# EAGLE board main controler-copy (EAGLE 9.5.2)
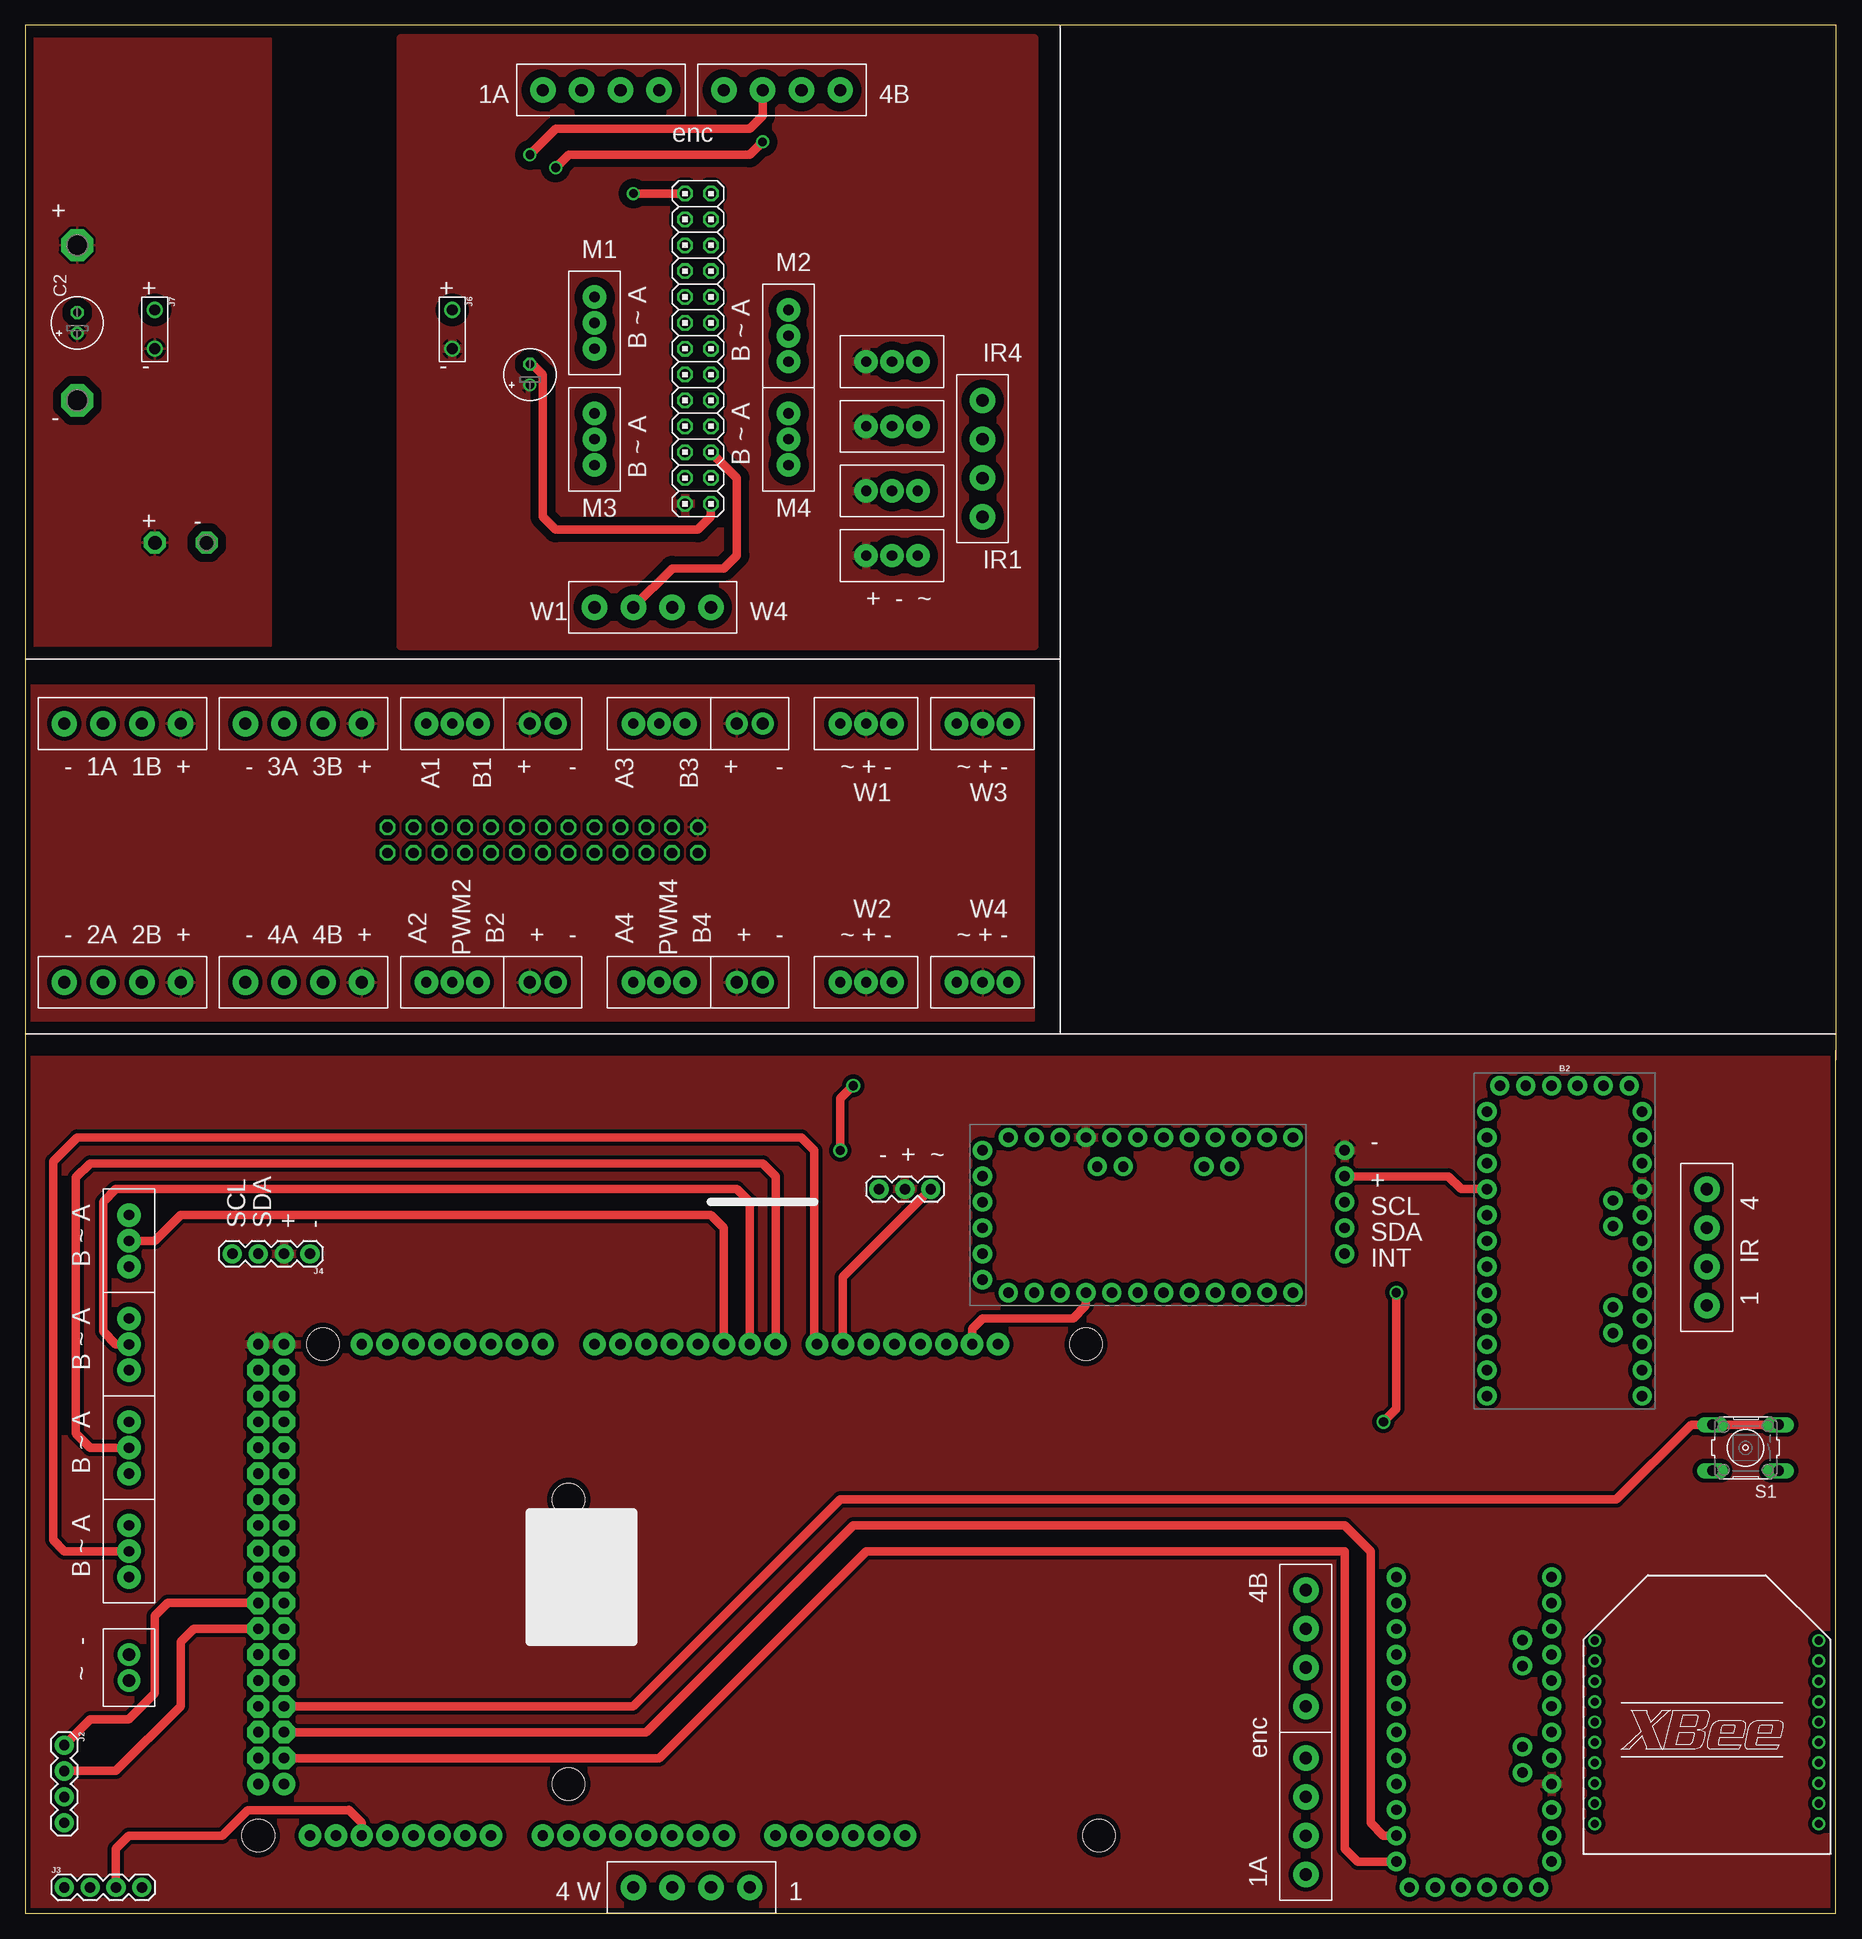
[diagram p0: board, top side]
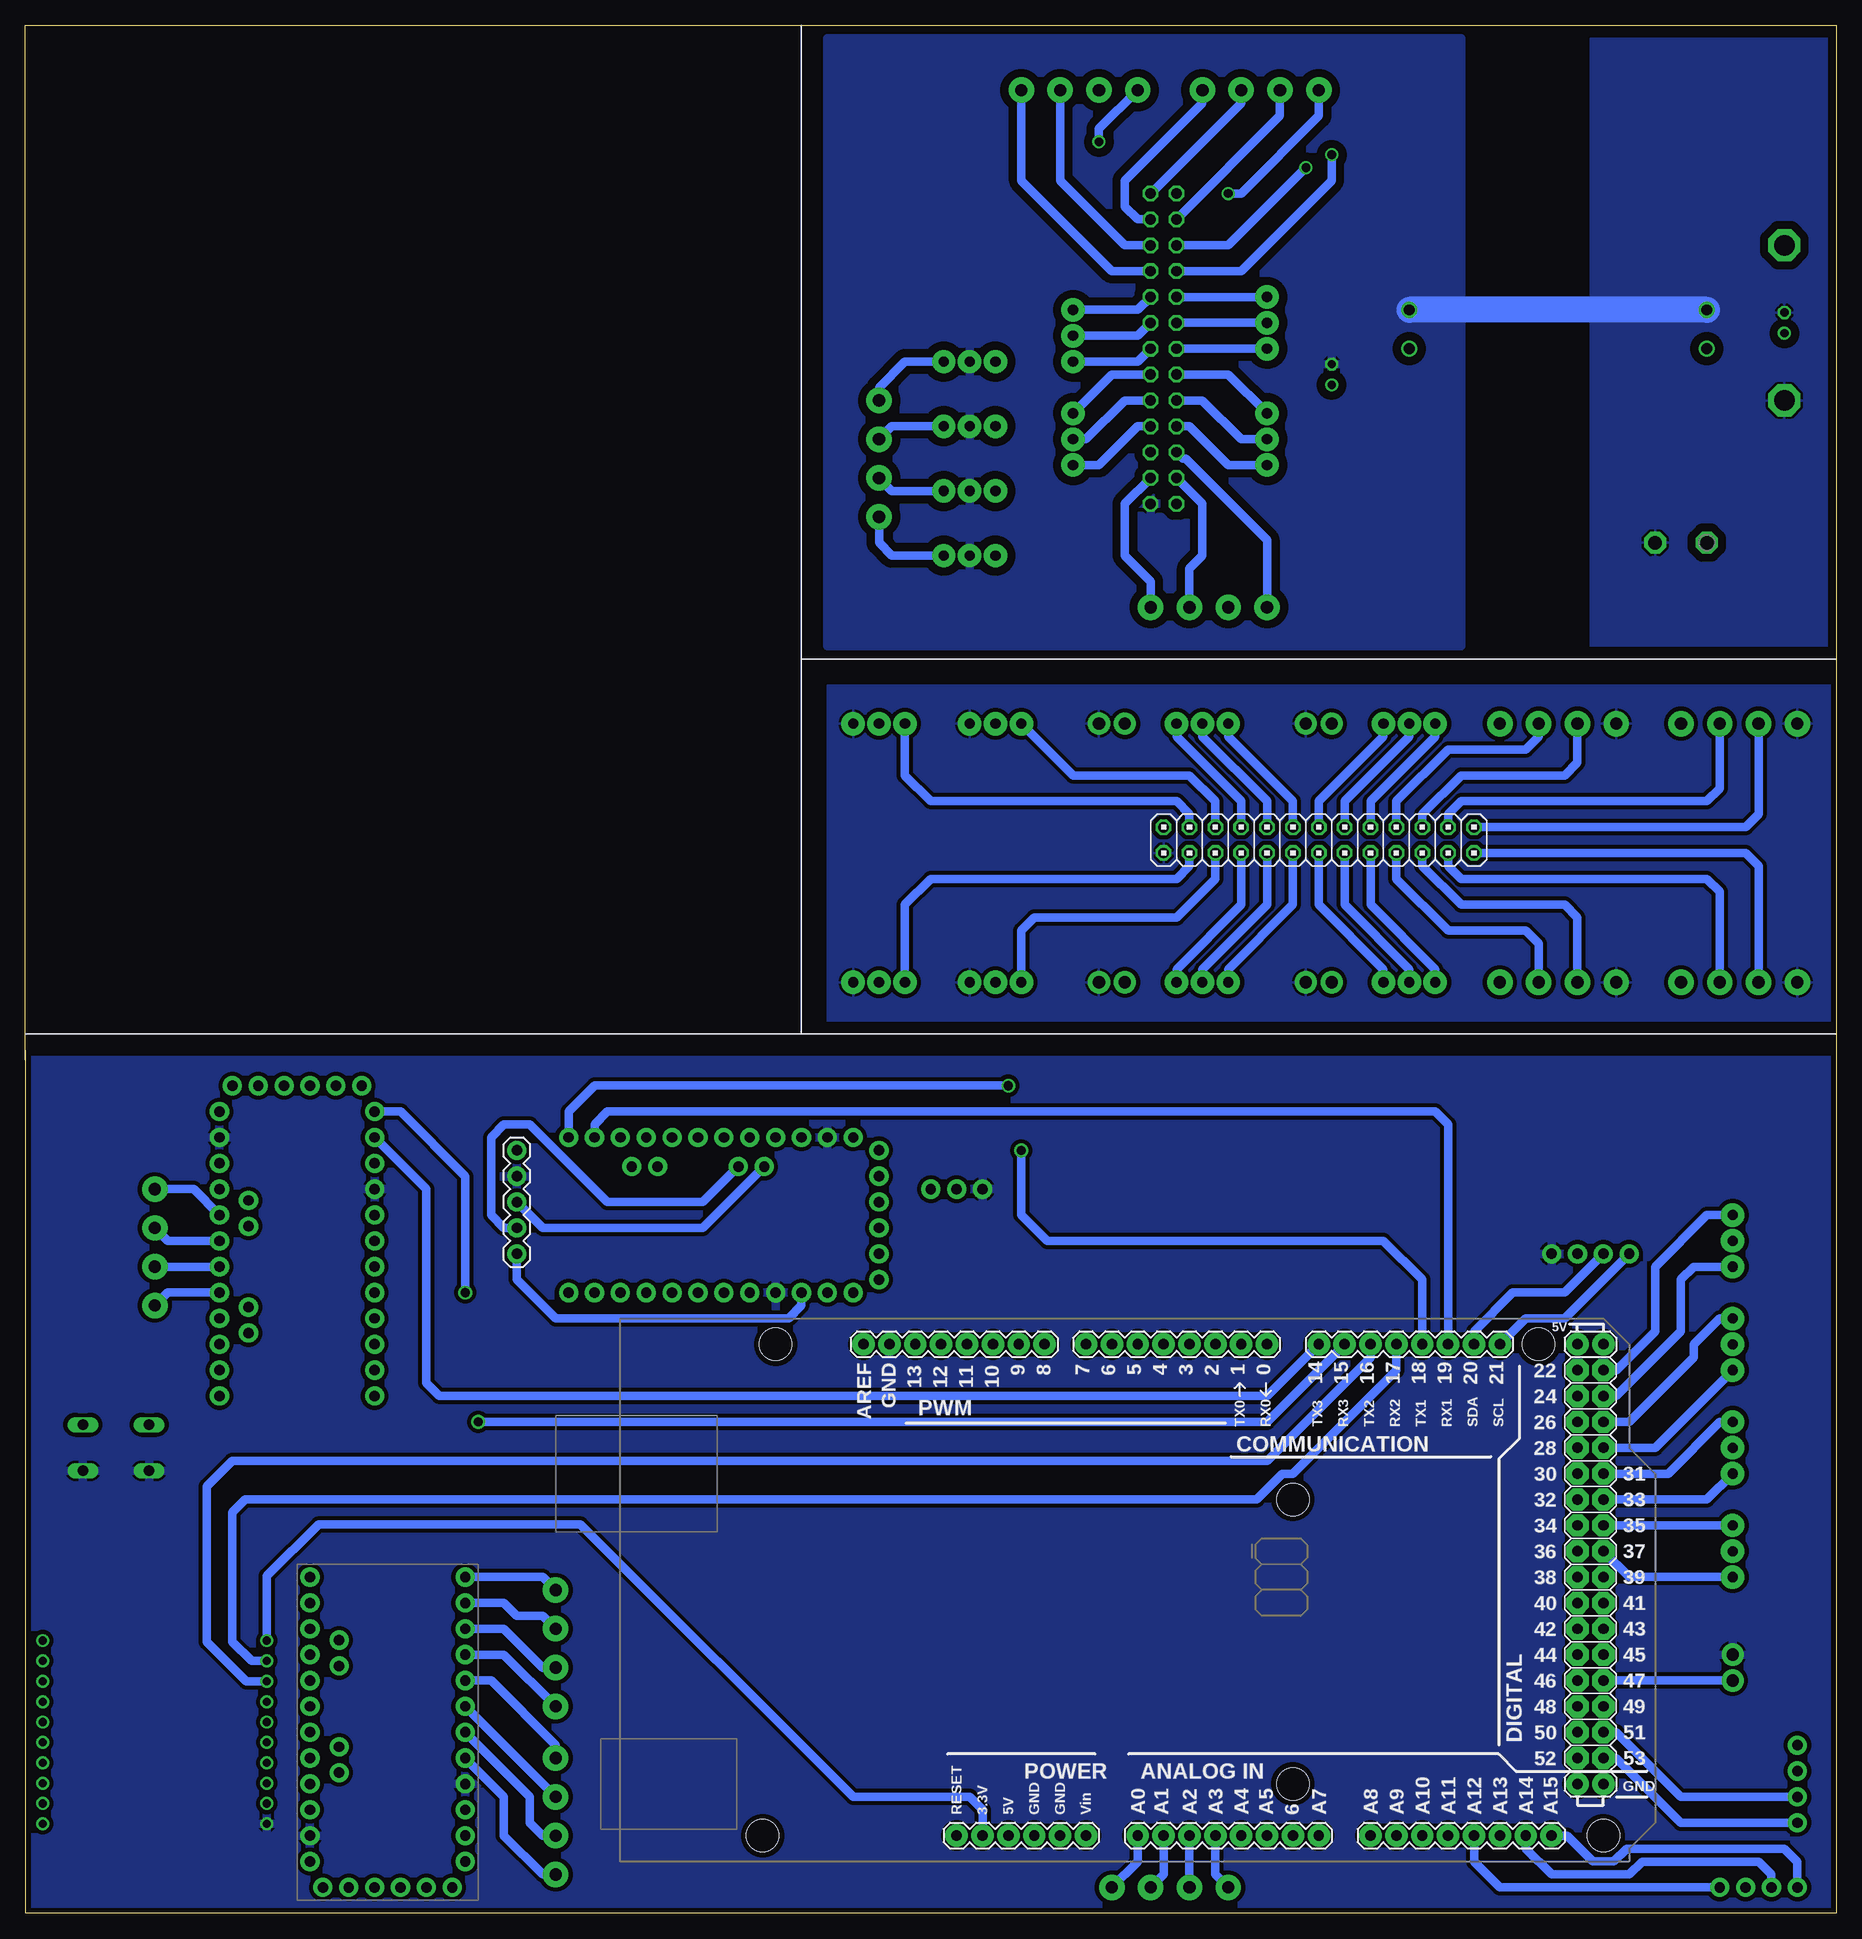
[diagram p1: board, bottom side, seen from below]

Size 177.8 x 185.42 mm. Coordinates in mm from the lower left corner, seen from the top.
Outline: 177.78,84.76 177.78,0 0,0 0,88.57
Outline: 177.8,83.82 177.8,185.42 0,185.42 0,87.63
Copper layers (1*16): Top 0.035mm / dielectric 1.6mm / Bottom 0.035mm
Design rules "Elecrow_2-layer_PCB_eagle_rule": minimum track width 6mil, minimum drill 12mil, track to track 6mil, track to pad 6mil, pad to pad 6mil, via to via 8mil, smd to smd 0mil, copper to edge 20mil, drill to drill 10mil, minimum pad ring 6mil, minimum via ring 6mil, stop-mask expansion 0mil, vias tented up to drill 100mil, thermal gap 10mil

## Footprints (pad centres in the part's own frame; a part is rotated, then mirrored left to right if it is on the bottom)
3PIN = drill 1 pad 2.3: P$1 0,0; P$2 2.54,0; P$3 5.08,0
ARDUINO_MEGA = drill 1.016 pad 2.2: 0 13.97,24.13; 1 11.43,24.13; 2 8.89,24.13; 3 6.35,24.13; 3.3V -13.97,-24.13; 4 3.81,24.13; 5 1.27,24.13; 5V@0 -11.43,-24.13; 5V@1 44.45,24.13; 5V@2 46.99,24.13; 6 -1.27,24.13; 7 -3.81,24.13; 8 -7.874,24.13; 9 -10.414,24.13; 10 -12.954,24.13; 11 -15.494,24.13; 12 -18.034,24.13; 13 -20.574,24.13; 14 19.05,24.13; 15 21.59,24.13; 16 24.13,24.13; 17 26.67,24.13; 18 29.21,24.13; 19 31.75,24.13; 20 34.29,24.13; 21 36.83,24.13; A0 1.27,-24.13; A1 3.81,-24.13; A2 6.35,-24.13; A3 8.89,-24.13; A4 11.43,-24.13; A5 13.97,-24.13; A6 16.51,-24.13; A7 19.05,-24.13; A8 24.13,-24.13; A9 26.67,-24.13; A10 29.21,-24.13; A11 31.75,-24.13; A12 34.29,-24.13; A13 36.83,-24.13; A14 39.37,-24.13; A15 41.91,-24.13; AREF -25.654,24.13; GND@0 -8.89,-24.13; GND@1 -6.35,-24.13; GND@2 44.45,-19.05; GND@3 46.99,-19.05; GND@4 -23.114,24.13; RESET -16.51,-24.13; VIN -3.81,-24.13 | drill 1.016 pad 2.2 octagon: 22 44.45,21.59; 23 46.99,21.59; 24 44.45,19.05; 25 46.99,19.05; 26 44.45,16.51; 27 46.99,16.51; 28 44.45,13.97; 29 46.99,13.97; 30 44.45,11.43; 31 46.99,11.43; 32 44.45,8.89; 33 46.99,8.89; 34 44.45,6.35; 35 46.99,6.35; 36 44.45,3.81; 37 46.99,3.81; 38 44.45,1.27; 39 46.99,1.27; 40 44.45,-1.27; 41 46.99,-1.27; 42 44.45,-3.81; 43 46.99,-3.81; 44 44.45,-6.35; 45 46.99,-6.35; 46 44.45,-8.89; 47 46.99,-8.89; 48 44.45,-11.43; 49 46.99,-11.43; 50 44.45,-13.97; 51 46.99,-13.97; 52 44.45,-16.51; 53 46.99,-16.51 | hole 3.2: -34.29,24.13; -35.56,-24.13; 16.51,8.89; 16.51,-19.05; 40.64,24.13; 46.99,-24.13
ARDUINO_PRO_MINI = drill 1.016 pad 1.88: 1 -7.62,12.7; 2 -7.62,10.16; 3 -7.62,7.62; 4 -7.62,5.08; 5 -7.62,2.54; 6 -7.62,0; 7 -7.62,-2.54; 8 -7.62,-5.08; 9 -7.62,-7.62; 10 -7.62,-10.16; 11 -7.62,-12.7; 12 -7.62,-15.24; 13 7.62,-15.24; 14 7.62,-12.7; 15 7.62,-10.16; 16 7.62,-7.62; 17 7.62,-5.08; 18 7.62,-2.54; 19 7.62,0; 20 7.62,2.54; 21 7.62,5.08; 22 7.62,7.62; 23 7.62,10.16; 24 7.62,12.7; A4 4.763,1.429; A5 4.763,3.969; A6 4.763,-9.049; A7 4.763,-6.509; BLK -6.35,15.24; GND -3.81,15.24; GRN 6.35,15.24; RXI 1.27,15.24; TXO 3.81,15.24; VCC -1.27,15.24
E2-5 = drill 0.813 pad 1.27: + -1.016,0 | drill 0.813 pad 1.27 octagon: - 1.016,0
2PIN = drill 1.2 pad 2.5: 1 0,0; 2 3.81,0; 3 7.62,0; 4 11.43,0
2PIN' = drill 1.2 pad 2.184: 1 0,0; 2 2.54,0
1X05 = drill 1.016 pad 1.88: 1 0,0; 2 2.54,0; 3 5.08,0; 4 7.62,0; 5 10.16,0
1X04 = drill 1.016 pad 1.88: 1 0,0; 2 2.54,0; 3 5.08,0; 4 7.62,0
1X03 = drill 1.016 pad 1.88: 1 0,0; 2 2.54,0; 3 5.08,0
1X02_BIG = drill 1.067: P$1 0,0; P$2 3.81,0
2X13 = drill 1.016 octagon: 1 -15.24,-1.27; 2 -15.24,1.27; 3 -12.7,-1.27; 4 -12.7,1.27; 5 -10.16,-1.27; 6 -10.16,1.27; 7 -7.62,-1.27; 8 -7.62,1.27; 9 -5.08,-1.27; 10 -5.08,1.27; 11 -2.54,-1.27; 12 -2.54,1.27; 13 0,-1.27; 14 0,1.27; 15 2.54,-1.27; 16 2.54,1.27; 17 5.08,-1.27; 18 5.08,1.27; 19 7.62,-1.27; 20 7.62,1.27; 21 10.16,-1.27; 22 10.16,1.27; 23 12.7,-1.27; 24 12.7,1.27; 25 15.24,-1.27; 26 15.24,1.27
B3F-10XX = drill 1.016 long: 1 -3.251,2.261; 2 3.251,2.261; 3 -3.251,-2.261; 4 3.251,-2.261
TESTPAD_P1-20 = drill 2.007 pad 3.15 octagon: TP 0,0
TESTPAD_P1-13 = drill 1.321 pad 2.159 octagon: TP 0,0
XBEE = drill 0.8 pad 1.27: 1 -11,9; 2 -11,7; 3 -11,5; 4 -11,3; 5 -11,1; 6 -11,-1; 7 -11,-3; 8 -11,-5; 9 -11,-7; 10 -11,-9; 11 11,-9; 12 11,-7; 13 11,-5; 14 11,-3; 15 11,-1; 16 11,1; 17 11,3; 18 11,5; 19 11,7; 20 11,9

## Placement (x,y rotation side)
3PIN1  3PIN  [3PIN]  80.01,116.84 0 top
3PIN2  3PIN  [3PIN]  80.01,91.44 0 top
3PIN3  3PIN  [3PIN]  91.44,116.84 0 top
3PIN4  3PIN  [3PIN]  91.44,91.44 0 top
3PIN5  3PIN  [3PIN]  44.45,116.84 180 top
3PIN6  3PIN  [3PIN]  44.45,91.44 180 top
3PIN7  3PIN  [3PIN]  64.77,116.84 180 top
3PIN8  3PIN  [3PIN]  64.77,91.44 180 top
B1  ARDUINO_MEGA_R3FULL  [ARDUINO_MEGA]  69.85,31.75 0 bottom
B2  ARDUINO_PRO_MINI  [ARDUINO_PRO_MINI]  151.13,66.04 0 top
B3  ARDUINO_PRO_MINI  [ARDUINO_PRO_MINI]  109.22,68.58 90 top
B4  ARDUINO_PRO_MINI  [ARDUINO_PRO_MINI]  142.24,17.78 180 bottom
C1  [E2-5]  49.53,151.13 90 top
C2  [E2-5]  5.08,156.21 90 top
CONNECTOR1  2PIN  [2PIN]  93.98,137.16 90 top
CONNECTOR2  2PIN  [2PIN]  55.88,128.27 0 top
CONNECTOR3  2PIN  [2PIN]  62.23,179.07 180 top
CONNECTOR4  2PIN  [2PIN]  80.01,179.07 180 top
CONNECTOR5  2PIN  [2PIN']  72.39,116.84 180 top
CONNECTOR6  2PIN  [2PIN']  72.39,91.44 180 top
CONNECTOR7  2PIN  [2PIN']  52.07,116.84 180 top
CONNECTOR8  2PIN  [2PIN']  52.07,91.44 180 top
CONNECTOR9  2PIN  [2PIN]  15.24,116.84 180 top
CONNECTOR10  2PIN  [2PIN]  15.24,91.44 180 top
CONNECTOR11  2PIN  [2PIN]  33.02,116.84 180 top
CONNECTOR12  2PIN  [2PIN]  33.02,91.44 180 top
ENCODER1  2PIN  [2PIN]  125.73,20.32 90 top
ENCODER2  2PIN  [2PIN]  125.73,3.81 90 top
ENCODER3  2PIN  [2PIN]  71.12,2.54 180 top
ENCODER4  2PIN  [2PIN]  165.1,59.69 90 top
IR_DISTANCE1  3PIN  [3PIN]  82.55,152.4 0 top
IR_DISTANCE2  3PIN  [3PIN]  82.55,146.05 0 top
IR_DISTANCE3  3PIN  [3PIN]  82.55,139.7 0 top
IR_DISTANCE4  3PIN  [3PIN]  82.55,133.35 0 top
IR_DISTANCE5  3PIN  [3PIN]  55.88,153.67 90 top
IR_DISTANCE6  3PIN  [3PIN]  74.93,157.48 270 top
IR_DISTANCE7  3PIN  [3PIN]  55.88,142.24 90 top
IR_DISTANCE8  3PIN  [3PIN]  74.93,147.32 270 top
J1  [1X05]  129.54,64.77 90 bottom
J2  [1X04]  3.81,16.51 270 top
J3  [1X04]  3.81,2.54 0 top
J4  [1X04]  27.94,64.77 180 top
J5  [1X03]  83.82,71.12 0 top
J6  [1X02_BIG]  41.91,157.48 270 top
J7  [1X02_BIG]  12.7,157.48 270 top
JP1  [2X13]  66.04,153.67 270 top
JP2  [2X13]  50.8,105.41 180 bottom
MOTOR1  3PIN  [3PIN]  10.16,68.58 270 top
MOTOR2  3PIN  [3PIN]  10.16,58.42 270 top
MOTOR3  3PIN  [3PIN]  10.16,48.26 270 top
MOTOR4  3PIN  [3PIN]  10.16,38.1 270 top
S1  [B3F-10XX]  168.91,45.72 180 top
SOLENOID  2PIN  [2PIN']  10.16,22.86 90 top
TP9  TESTPAD_TPSQPAD1-20  [TESTPAD_P1-20]  5.08,163.83 0 top
TP10  TESTPAD_TPSQPAD1-20  [TESTPAD_P1-20]  5.08,148.59 0 top
TP15  TESTPAD_TPSQPAD1-13  [TESTPAD_P1-13]  12.7,134.62 0 bottom
TP16  TESTPAD_TPSQPAD1-13  [TESTPAD_P1-13]  17.78,134.62 0 top
XB1  XBEE  [XBEE]  165.1,17.78 0 top

## Library data of the parts
3PIN1-3PIN8 IR_DISTANCE1-IR_DISTANCE8 MOTOR1-MOTOR4 = 3PIN_2
B1-B4 = Arduino
C1 C2 = rcl; SPICEPREFIX: C
CONNECTOR1-CONNECTOR4 CONNECTOR9-CONNECTOR12 ENCODER1-ENCODER4 = 4pin_small
CONNECTOR5-CONNECTOR8 SOLENOID = 2pin_small
J1 J5-J7 = SparkFun-Connectors
J2-J4 = SparkFun-Connectors; PROD_ID: CONN-09696
JP1 JP2 = pinhead
S1 = DC_LOAD_AU; MPN: B3F-1000; OC_FARNELL: 176432; OC_NEWARK: 36M3542
TP9 TP10 TP15 TP16 = BeagleBone_Blue_R3
XB1 = maxstream; MPN: XBP24-Z7UIT-004; OC_FARNELL: 1751799; OC_NEWARK: 34R5507

## Nets
1_A: B4.5 ENCODER2.1
1_A1: CONNECTOR3.4 JP1.1
1_A2: CONNECTOR9.3 JP2.1
1_B: B4.6 ENCODER2.2
1_B1: CONNECTOR3.3 JP1.3
1_B2: CONNECTOR9.2 JP2.3
2_A: B4.7 ENCODER2.3
2_A1: CONNECTOR3.2 JP1.2
2_A2: CONNECTOR10.3 JP2.2
2_B: B4.8 ENCODER2.4
2_B1: CONNECTOR3.1 JP1.4
2_B2: CONNECTOR10.2 JP2.4
3_A: B4.9 ENCODER1.1
3_A1: CONNECTOR4.4 JP1.5
3_A2: CONNECTOR11.3 JP2.5
3_B: B4.10 ENCODER1.2
3_B1: CONNECTOR4.3 JP1.7
3_B2: CONNECTOR11.2 JP2.7
4_A: B4.11 ENCODER1.3
4_A1: CONNECTOR4.2 JP1.6
4_A2: CONNECTOR12.3 JP2.6
4_B: B4.12 ENCODER1.4
4_B1: CONNECTOR4.1 JP1.8
4_B2: CONNECTOR12.2 JP2.8
A1: B1.23 MOTOR1.P$1
A2: B1.27 MOTOR2.P$1
A3: B1.31 MOTOR3.P$1
A4: B1.35 MOTOR4.P$1
A5: IR_DISTANCE7.P$3 JP1.15
A6: IR_DISTANCE8.P$1 JP1.16
A7: IR_DISTANCE6.P$1 JP1.10
A8: IR_DISTANCE5.P$3 JP1.9
A9: 3PIN5.P$3 JP2.9
A10: 3PIN6.P$3 JP2.10
A11: 3PIN7.P$3 JP2.15
A12: 3PIN8.P$3 JP2.16
B1: B1.25 MOTOR1.P$3
B2: B1.29 MOTOR2.P$3
B3: B1.33 MOTOR3.P$3
B4: B1.37 MOTOR4.P$3
B5: IR_DISTANCE8.P$3 JP1.20
B6: IR_DISTANCE7.P$1 JP1.19
B7: IR_DISTANCE6.P$3 JP1.14
B8: IR_DISTANCE5.P$1 JP1.13
B9: 3PIN5.P$1 JP2.13
B10: 3PIN6.P$1 JP2.14
B11: 3PIN7.P$1 JP2.19
B12: 3PIN8.P$1 JP2.20
BALL_SENSOR: B1.49
BUTTON: B1.48 S1.3 S1.4
DRIBBLER: B1.9 J5.3
GND: B1.GND@4 B2.4 B2.23 B3.4 B3.23 B4.4 B4.23 J1.4 J4.1 J5.1 S1.1 S1.2 SOLENOID.2 XB1.10
GND1: C1.- C2.- IR_DISTANCE1.P$2 IR_DISTANCE2.P$2 IR_DISTANCE3.P$2 IR_DISTANCE4.P$2 J6.P$1 J7.P$1 JP1.26 TP10.TP TP16.TP
GND2: 3PIN1.P$3 3PIN2.P$3 3PIN3.P$3 3PIN4.P$3 CONNECTOR5.1 CONNECTOR6.1 CONNECTOR7.1 CONNECTOR8.1 CONNECTOR9.4 CONNECTOR10.4 CONNECTOR11.4 CONNECTOR12.4 JP2.26
INT: B3.3 J1.1
IR1: B2.17 ENCODER4.1
IR2: B2.18 ENCODER4.2
IR3: B2.19 ENCODER4.3
IR4: B2.20 ENCODER4.4
IR5: CONNECTOR1.3 IR_DISTANCE2.P$3
IR6: CONNECTOR1.2 IR_DISTANCE3.P$3
IR7: CONNECTOR1.1 IR_DISTANCE4.P$3
IR8: CONNECTOR1.4 IR_DISTANCE1.P$3
N$1: B1.3.3V XB1.1
N$2: B1.16 XB1.3
N$3: B1.15 B2.1
N$4: B1.14 B2.2
N$5: B1.17 XB1.2
N$6: B1.19 B3.14
N$7: B1.18 B3.13
N$8: B1.50 B4.2
N$9: B1.52 B4.1
N$10: B2.24
N$11: B3.24
N$12: B4.24
N$13: B1.43 J2.2
N$14: B1.51 J2.3
N$15: B1.53 J2.4
N$16: B1.41 J2.1
N$17: B1.A15 J3.1
N$18: B1.A14 J3.2
N$19: B1.A13 J3.3
N$20: B1.A12 J3.4
N$22: B1.21 J4.4
N$23: B1.20 J4.3
PWM1: B1.5 MOTOR1.P$2
PWM2: B1.6 MOTOR2.P$2
PWM3: B1.7 MOTOR3.P$2
PWM4: B1.8 MOTOR4.P$2
PWM5: IR_DISTANCE7.P$2 JP1.17
PWM6: IR_DISTANCE8.P$2 JP1.18
PWM7: IR_DISTANCE6.P$2 JP1.12
PWM8: IR_DISTANCE5.P$2 JP1.11
PWM9: 3PIN5.P$2 JP2.11
PWM10: 3PIN6.P$2 JP2.12
PWM11: 3PIN7.P$2 JP2.17
PWM12: 3PIN8.P$2 JP2.18
SCL: B3.A5 J1.3
SDA: B3.A4 J1.2
SOLENOID: B1.47 SOLENOID.1
VCC: B1.5V@1 B1.5V@2 B2.21 B3.21 B4.21 J1.5 J4.2 J5.2
VCC1: C1.+ IR_DISTANCE1.P$1 IR_DISTANCE2.P$1 IR_DISTANCE3.P$1 IR_DISTANCE4.P$1 J6.P$2 JP1.25
VCC2: 3PIN1.P$2 3PIN2.P$2 3PIN3.P$2 3PIN4.P$2 CONNECTOR5.2 CONNECTOR6.2 CONNECTOR7.2 CONNECTOR8.2 CONNECTOR9.1 CONNECTOR10.1 CONNECTOR11.1 CONNECTOR12.1 JP2.25
VDD: C2.+ J7.P$2 TP9.TP TP15.TP
W1: B1.A0 ENCODER3.1
W2: B1.A1 ENCODER3.2
W3: B1.A2 ENCODER3.3
W4: B1.A3 ENCODER3.4
W5: CONNECTOR2.1 JP1.21
W6: CONNECTOR2.2 JP1.22
W7: CONNECTOR2.4 JP1.24
W8: CONNECTOR2.3 JP1.23
W9: 3PIN1.P$1 JP2.21
W10: 3PIN2.P$1 JP2.22
W11: 3PIN3.P$1 JP2.23
W12: 3PIN4.P$1 JP2.24

## Tracks (layer width: path | path; a pad name or v marks a point on that pad's centre or on a via)
1_A
  Bottom 0.813: B4.5 130.81,11.43 130.81,7.62 127,3.81 ENCODER2.1
1_A1  (via drill 0.85)
  Top 0.813: JP1.1 v59.69,168.91
  Bottom 0.813: v59.69,168.91 58.42,168.91 50.8,176.53 CONNECTOR3.4
1_A2
  Bottom 0.813: JP2.1 8.89,106.68 7.62,107.95 CONNECTOR9.3
1_B
  Bottom 0.813: B4.6 128.27,11.43 128.27,8.89 127,7.62 ENCODER2.2
1_B1
  Bottom 0.813: JP1.3 54.61,176.53 CONNECTOR3.3
1_B2
  Bottom 0.813: CONNECTOR9.2 11.43,110.49 12.7,109.22 36.83,109.22 38.1,107.95 JP2.3
2_A
  Bottom 0.813: ENCODER2.3 B4.7
2_A1
  Bottom 0.813: CONNECTOR3.2 58.42,177.8 JP1.2
2_A2
  Bottom 0.813: JP2.2 8.89,104.14 7.62,102.87 CONNECTOR10.3
2_B
  Bottom 0.813: B4.8 132.08,22.86 125.73,16.51 ENCODER2.4
2_B1
  Bottom 0.813: CONNECTOR3.1 62.23,177.8 69.85,170.18 69.85,167.64 68.58,166.37 JP1.4
2_B2
  Bottom 0.813: JP2.4 38.1,102.87 36.83,101.6 12.7,101.6 11.43,100.33 CONNECTOR10.2
3_A
  Bottom 0.813: ENCODER1.1 130.81,25.4 B4.9
3_A1  (via drill 0.85)
  Top 0.813: v72.39,173.99 71.12,172.72 53.34,172.72 v52.07,171.45
  Bottom 0.813: v52.07,171.45 59.69,163.83 JP1.5 | CONNECTOR4.4 72.39,175.26 v72.39,173.99
3_A2
  Bottom 0.813: JP2.5 40.64,107.95 36.83,111.76 26.67,111.76 25.4,113.03 CONNECTOR11.3
3_B
  Bottom 0.813: B4.10 130.81,27.94 127,24.13 ENCODER1.2
3_B1  (via drill 0.85)
  Top 0.813: v49.53,172.72 52.07,175.26 71.12,175.26 72.39,176.53 CONNECTOR4.3
  Bottom 0.813: JP1.7 58.42,161.29 49.53,170.18 v49.53,172.72
3_B2
  Bottom 0.813: CONNECTOR11.2 29.21,115.57 30.48,114.3 38.1,114.3 43.18,109.22 JP2.7
4_A
  Bottom 0.813: ENCODER1.3 127,29.21 129.54,29.21 130.81,30.48 B4.11
4_A1
  Bottom 0.813: JP1.6 69.85,163.83 76.2,170.18 CONNECTOR4.2
4_A2
  Bottom 0.813: JP2.6 40.64,102.87 36.83,99.06 26.67,99.06 25.4,97.79 CONNECTOR12.3
4_B
  Bottom 0.813: B4.12 127,33.02 ENCODER1.4
4_B1
  Bottom 0.813: CONNECTOR4.1 80.01,170.18 71.12,161.29 JP1.8
4_B2
  Bottom 0.813: JP2.8 43.18,101.6 38.1,96.52 30.48,96.52 29.21,95.25 CONNECTOR12.2
A1
  Bottom 0.813: MOTOR1.P$1 12.7,68.58 17.78,63.5 17.78,57.15 21.59,53.34 B1.23
A2
  Bottom 0.813: B1.27 20.32,48.26 13.97,54.61 13.97,55.88 11.43,58.42 MOTOR2.P$1
A3
  Bottom 0.813: MOTOR3.P$1 11.43,48.26 16.51,43.18 B1.31
A4
  Bottom 0.813: MOTOR4.P$1 B1.35
A5
  Bottom 0.813: JP1.15 59.69,151.13 IR_DISTANCE7.P$3
A6
  Bottom 0.813: JP1.16 71.12,151.13 IR_DISTANCE8.P$1
A7
  Bottom 0.813: IR_DISTANCE6.P$1 68.58,157.48 JP1.10
A8
  Bottom 0.813: IR_DISTANCE5.P$3 JP1.9
A9
  Bottom 0.813: 3PIN5.P$3 39.37,115.57 45.72,109.22 JP2.9
A10
  Bottom 0.813: 3PIN6.P$3 39.37,92.71 45.72,99.06 JP2.10
A11
  Bottom 0.813: 3PIN7.P$3 59.69,115.57 53.34,109.22 JP2.15
A12
  Bottom 0.813: 3PIN8.P$3 59.69,92.71 53.34,99.06 JP2.16
B1
  Bottom 0.813: B1.25 21.59,50.8 15.24,57.15 15.24,62.23 13.97,63.5 MOTOR1.P$3
B2
  Bottom 0.813: B1.29 17.78,45.72 MOTOR2.P$3
B3
  Bottom 0.813: B1.33 12.7,40.64 MOTOR3.P$3
B4
  Bottom 0.813: B1.37 20.32,33.02 MOTOR4.P$3
B5
  Bottom 0.813: JP1.20 68.58,146.05 72.39,142.24 IR_DISTANCE8.P$3
B6
  Bottom 0.813: JP1.19 63.5,146.05 59.69,142.24 IR_DISTANCE7.P$1
B7
  Bottom 0.813: IR_DISTANCE6.P$3 68.58,152.4 JP1.14
B8
  Bottom 0.813: IR_DISTANCE5.P$1 JP1.13
B9
  Bottom 0.813: JP2.13 50.8,109.22 44.45,115.57 3PIN5.P$1
B10
  Bottom 0.813: JP2.14 50.8,99.06 44.45,92.71 3PIN6.P$1
B11
  Bottom 0.813: 3PIN7.P$1 64.77,115.57 58.42,109.22 JP2.19
B12
  Bottom 0.813: JP2.20 58.42,99.06 64.77,92.71 3PIN8.P$1
BUTTON
  Top 0.813: B1.48 59.69,20.32 80.01,40.64 156.21,40.64 163.55,47.98 S1.4 S1.3
DRIBBLER
  Top 0.813: B1.9 80.26,62.48 J5.3
GND
  Top 0.813: B2.4 140.97,71.12 139.7,72.39 J1.4 | B3.4 104.14,59.69 102.87,58.42 93.98,58.42 92.96,57.4 B1.GND@4
  pour Bottom (isolate 0.406): 0,83.82 0,0 177.8,0 177.8,83.82
GND1
  Top 0.813: JP1.26 67.31,137.16 66.04,135.89 52.07,135.89 50.8,137.16 50.8,151.13 49.78,152.15 C1.-
  Bottom 2.54: J7.P$1 J6.P$1
  pour Bottom (isolate 0.813): 0,184.15 0,124.46 24.13,124.46 24.13,184.15
  pour Bottom (isolate 0.813): 36.83,184.15 36.83,124.46 99.06,124.46 99.06,184.15
GND2
  pour Bottom (isolate 0.406): 0,120.65 0,87.63 99.06,87.63 99.06,120.65
INT
  Bottom 0.813: B3.3 101.6,59.69 102.87,58.42 125.73,58.42 129.54,62.23 J1.1
IR1
  Bottom 0.813: ENCODER4.1 163.83,60.96 B2.17
IR2
  Bottom 0.813: B2.18 ENCODER4.2
IR3
  Bottom 0.813: ENCODER4.3 163.83,66.04 B2.19
IR4
  Bottom 0.813: ENCODER4.4 161.29,71.12 B2.20
IR5
  Bottom 0.813: IR_DISTANCE2.P$3 92.71,146.05 CONNECTOR1.3
IR6
  Bottom 0.813: CONNECTOR1.2 92.71,139.7 IR_DISTANCE3.P$3
IR7
  Bottom 0.813: CONNECTOR1.1 93.98,134.62 92.71,133.35 IR_DISTANCE4.P$3
IR8
  Bottom 0.813: IR_DISTANCE1.P$3 91.44,152.4 93.98,149.86 CONNECTOR1.4
N$1
  Bottom 0.813: XB1.1 154.1,33.13 149.02,38.21 123.3,38.21 96.52,11.43 85.09,11.43 83.82,10.16 B1.3.3V
N$2
  Bottom 0.813: XB1.3 156.13,22.78 160.02,26.67 160.02,41.91 157.48,44.45 55.88,44.45 45.72,54.61 B1.16
N$3  (via drill 0.9)
  Top 0.813: v133.35,48.26 134.62,49.53 v134.62,60.96
  Bottom 0.813: B2.1 140.97,78.74 134.62,72.39 v134.62,60.96 | B1.15 55.88,48.26 v133.35,48.26
N$4
  Bottom 0.813: B2.2 138.43,71.12 138.43,52.07 137.16,50.8 55.88,50.8 B1.14
N$5
  Bottom 0.813: B1.17 43.18,53.34 53.37,43.15 54.38,43.15 56.9,40.64 156.21,40.64 157.48,39.37 157.48,26.67 155.59,24.78 XB1.2
N$6
  Bottom 0.813: B3.14 121.92,77.47 120.65,78.74 39.37,78.74 38.1,77.47 B1.19
N$7  (via drill 0.9)
  Top 0.813: v81.28,81.28 80.01,80.01 v80.01,74.93
  Bottom 0.813: B3.13 124.46,78.74 121.92,81.28 v81.28,81.28 | v80.01,74.93 80.01,68.58 77.47,66.04 44.45,66.04 40.64,62.23 B1.18
N$8
  Top 0.813: B4.2 133.35,7.62 132.08,8.89 132.08,35.56 129.54,38.1 81.28,38.1 60.96,17.78 B1.50
N$9
  Top 0.813: B4.1 130.81,5.08 129.54,6.35 129.54,35.56 82.55,35.56 62.23,15.24 B1.52
N$13
  Top 0.813: J2.2 8.89,13.97 15.24,20.32 15.24,26.67 16.51,27.94 B1.43
N$14
  Bottom 0.813: J2.3 15.24,11.43 21.59,17.78 B1.51
N$15
  Bottom 0.813: B1.53 21.59,15.24 15.24,8.89 J2.4
N$16
  Top 0.813: J2.1 6.35,19.05 10.16,19.05 12.7,21.59 12.7,29.21 13.97,30.48 B1.41
N$17
  Bottom 0.813: B1.A15 26.42,7.62 23.9,5.11 21.82,5.11 20.57,6.35 5.08,6.35 3.81,5.08 J3.1
N$18
  Bottom 0.813: J3.2 6.35,3.81 7.62,5.08 19.05,5.08 20.32,3.81 27.94,3.81 30.48,6.35 B1.A14
N$19
  Top 0.813: J3.3 8.89,6.35 10.16,7.62 19.3,7.62 21.82,10.13 31.72,10.13 31.75,10.16 33.02,8.89 B1.A13
N$20
  Bottom 0.813: J3.4 33.02,2.54 35.56,5.08 B1.A12
N$22
  Bottom 0.813: B1.21 30.48,58.42 26.67,58.42 J4.4
N$23
  Bottom 0.813: J4.3 26.67,60.96 31.75,60.96 35.56,57.15 B1.20
PWM1
  Top 0.813: B1.5 68.58,67.31 67.31,68.58 15.24,68.58 12.7,66.04 MOTOR1.P$2
PWM2
  Top 0.813: B1.6 71.12,69.85 69.85,71.12 8.89,71.12 7.62,69.85 7.62,62.23 7.62,60.96 7.62,57.15 8.89,55.88 MOTOR2.P$2
PWM3
  Top 0.813: B1.7 73.66,72.39 72.39,73.66 6.35,73.66 4.95,72.26 4.95,47.12 6.35,45.72 MOTOR3.P$2
PWM4
  Top 0.813: B1.8 77.47,55.88 77.47,74.93 76.2,76.2 5.08,76.2 2.71,73.83 2.71,36.66 3.81,35.56 MOTOR4.P$2
PWM5
  Bottom 0.813: JP1.17 62.23,148.59 58.42,144.78 IR_DISTANCE7.P$2
PWM6
  Bottom 0.813: JP1.18 69.85,148.59 73.66,144.78 IR_DISTANCE8.P$2
PWM7
  Bottom 0.813: JP1.12 68.58,154.94 IR_DISTANCE6.P$2
PWM8
  Bottom 0.813: IR_DISTANCE5.P$2 JP1.11
PWM9
  Bottom 0.813: 3PIN5.P$2 41.91,115.57 48.26,109.22 JP2.11
PWM10
  Bottom 0.813: 3PIN6.P$2 41.91,92.71 48.26,99.06 JP2.12
PWM11
  Bottom 0.813: JP2.17 55.88,109.22 62.23,115.57 3PIN7.P$2
PWM12
  Bottom 0.813: 3PIN8.P$2 62.23,92.71 55.88,99.06 JP2.18
SCL
  Bottom 0.813: J1.3 127,67.31 111.28,67.31 B3.A5
SDA
  Bottom 0.813: B3.A4 111.28,69.85 120.65,69.85 128.27,77.47 130.81,77.47 132.08,76.2 132.08,68.58 130.81,67.31 J1.2
SOLENOID
  Bottom 0.813: SOLENOID.1 B1.47
VCC
  pour Top (isolate 0.406): 0,83.82 0,0 177.8,0 177.8,83.82
VCC1
  pour Top (isolate 0.813): 36.83,184.15 36.83,124.46 99.06,124.46 99.06,184.15
VCC2
  pour Top (isolate 0.406): 0,120.65 0,87.63 99.06,87.63 99.06,120.65
VDD
  pour Top (isolate 0.813): 0,184.15 24.13,184.15 24.13,124.46 0,124.46
W1
  Bottom 0.813: B1.A0 68.58,5.08 ENCODER3.1
W2
  Bottom 0.813: B1.A1 66.04,3.81 ENCODER3.2
W3
  Bottom 0.813: B1.A2 ENCODER3.3
W4
  Bottom 0.813: B1.A3 60.96,3.81 ENCODER3.4
W5
  Bottom 0.813: JP1.21 64.13,142.88 63.87,142.88 55.88,134.88 CONNECTOR2.1
W6
  Top 0.813: JP1.22 69.85,140.97 69.85,133.35 68.58,132.08 63.5,132.08 CONNECTOR2.2
W7
  Bottom 0.813: JP1.24 69.85,138.43 69.85,133.35 67.31,130.81 CONNECTOR2.4
W8
  Bottom 0.813: JP1.23 62.23,138.43 62.23,133.35 63.5,132.08 CONNECTOR2.3
W9
  Bottom 0.813: 3PIN1.P$1 74.93,111.76 63.5,111.76 60.96,109.22 JP2.21
W10
  Bottom 0.813: JP2.22 60.96,101.6 64.77,97.79 78.74,97.79 80.01,96.52 3PIN2.P$1
W11
  Bottom 0.813: JP2.23 63.5,107.95 64.77,109.22 88.9,109.22 91.44,111.76 3PIN3.P$1
W12
  Bottom 0.813: JP2.24 63.5,102.87 64.77,101.6 88.9,101.6 91.44,99.06 3PIN4.P$1

## Text on the board
tNames: 1A | 4B | enc | + | M1 | M2 | + | + | B ~ A | B ~ A | IR4 | - | - | - | B ~ A | B ~ A | M3 | M4 | + | - | IR1 | + - ~ | W1 | W4 | - 1A 1B + | - 3A 3B + | + | - | + | - | ~ + - | ~ + - | A1 | B1 | A3 | B3 | W1 | W3 | PWM2 | PWM4 | W2 | W4 | - 2A 2B + | - 4A 4B + | A2 | B2 | + | - | A4 | B4 | + | - | ~ + - | ~ + - | - | - + ~ | + | SCL | SCL | SDA | + | - | SDA | B ~ A | INT | 1 IR 4 | B ~ A | B ~ A | B ~ A | 4B | ~ - | enc | 1A | 4 W | 1